# Altium PCB PCB1.PcbDoc
Units mil, origin at the board's own origin, x right, y up, seen from the top; angles counter-clockwise.
Board outline 1820 x 925 mil, 4 copper layers (Top Layer, GND1, GND2, Bottom Layer), stack 23.756 mil thick; 19 components, 11 nets, 102 pads, 29 vias.
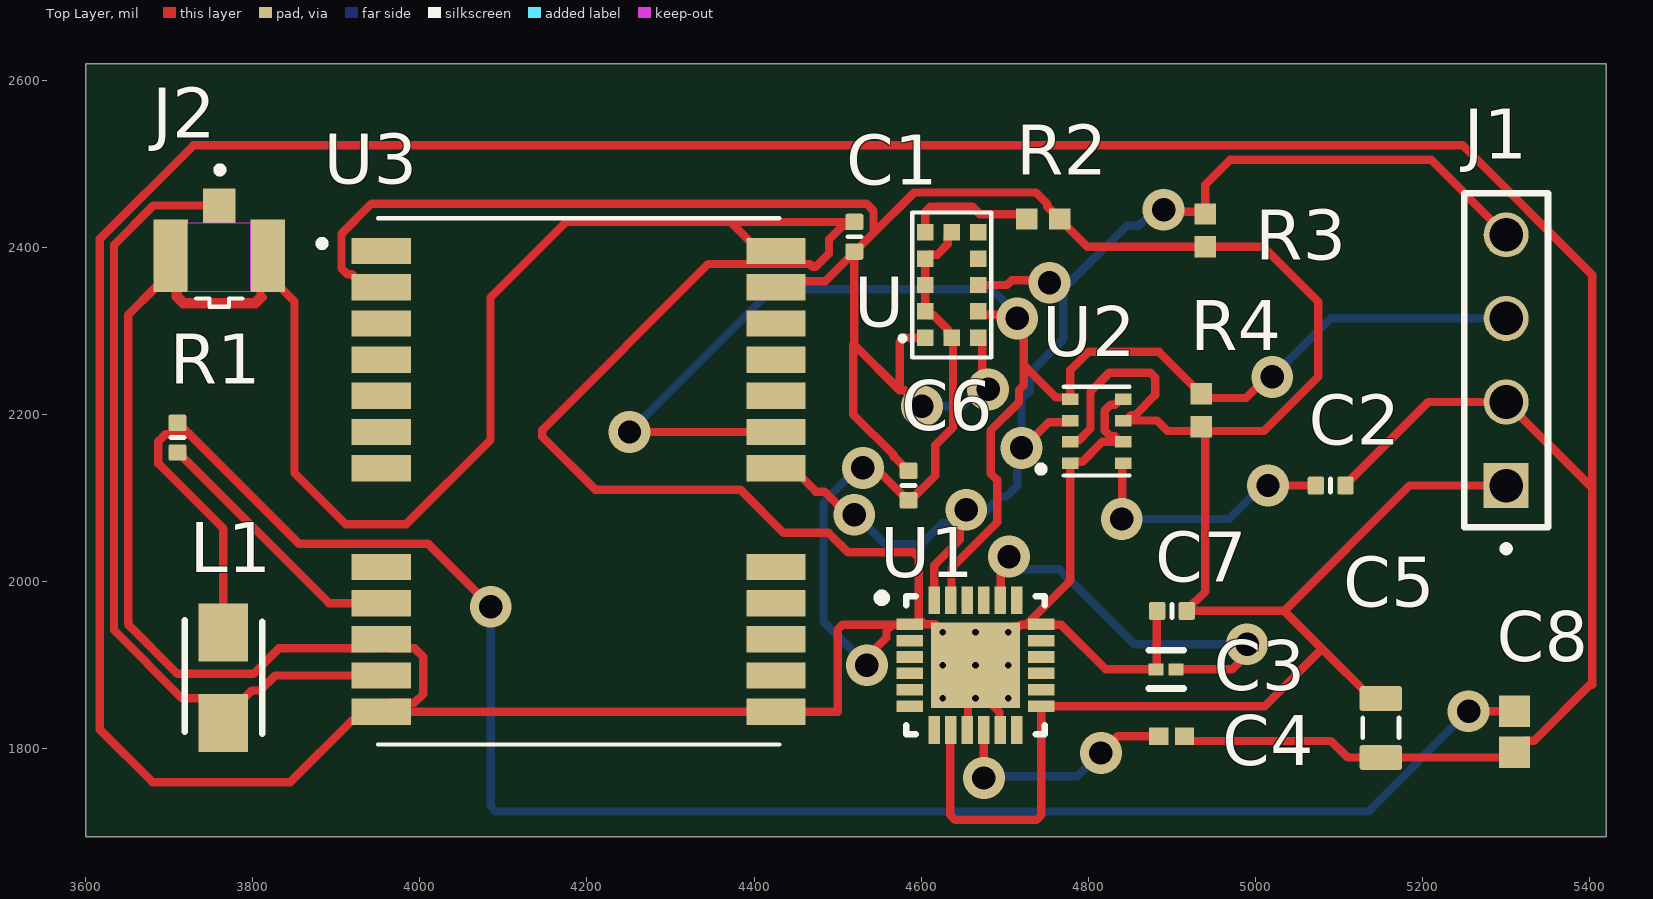
[diagram p0: Top Layer view]
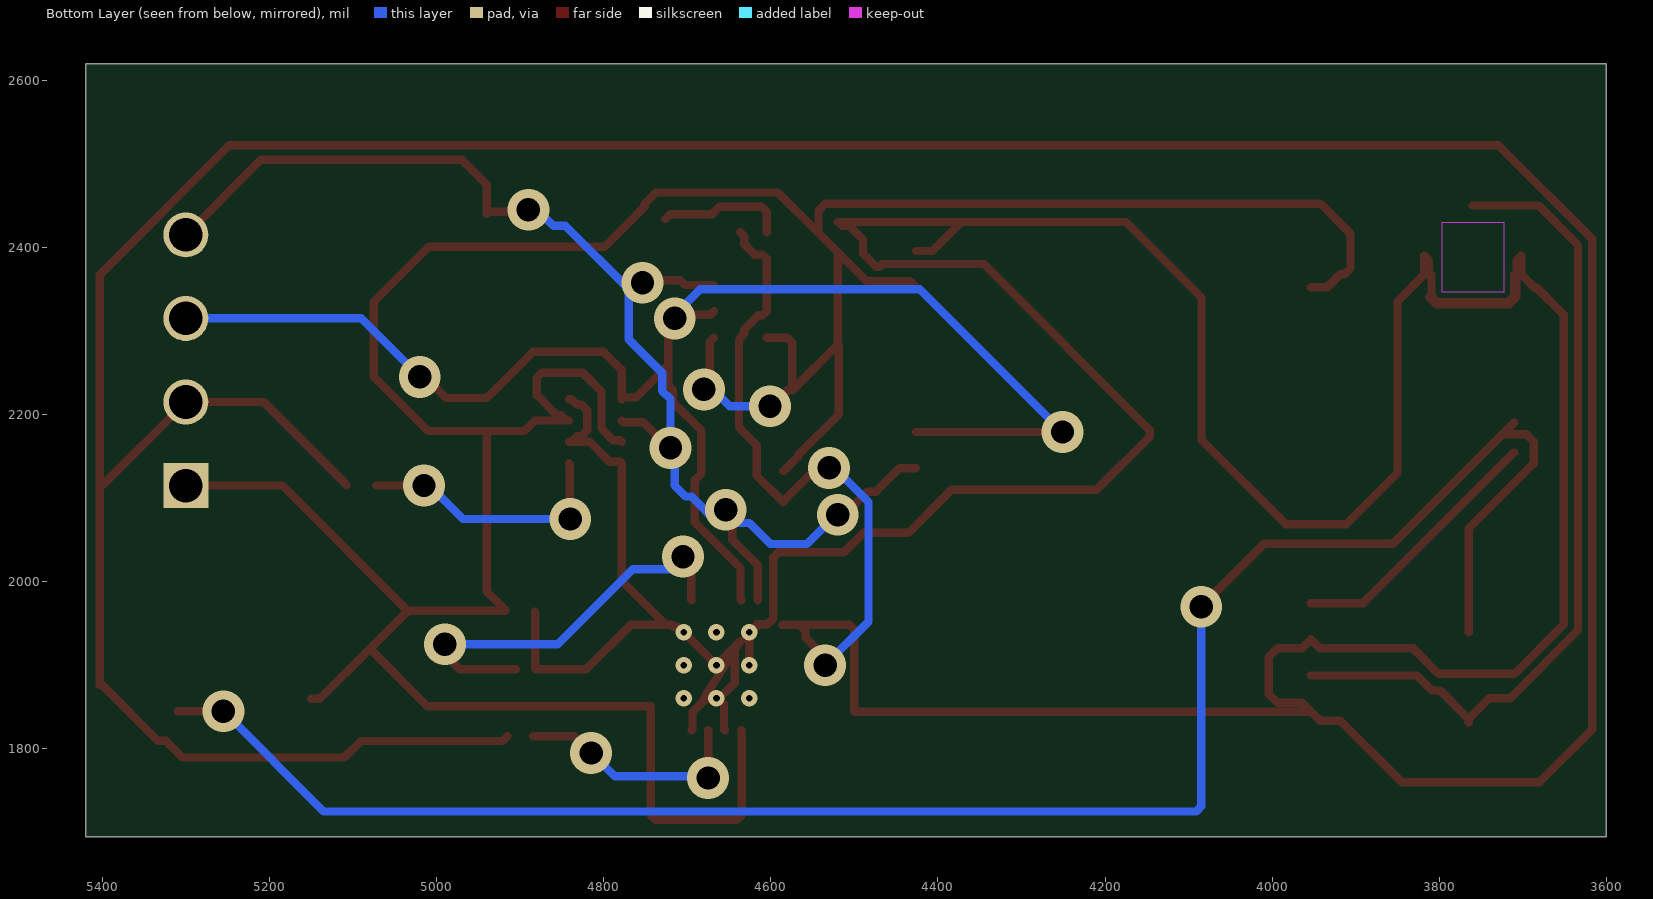
[diagram p1: Bottom Layer view, seen from below]
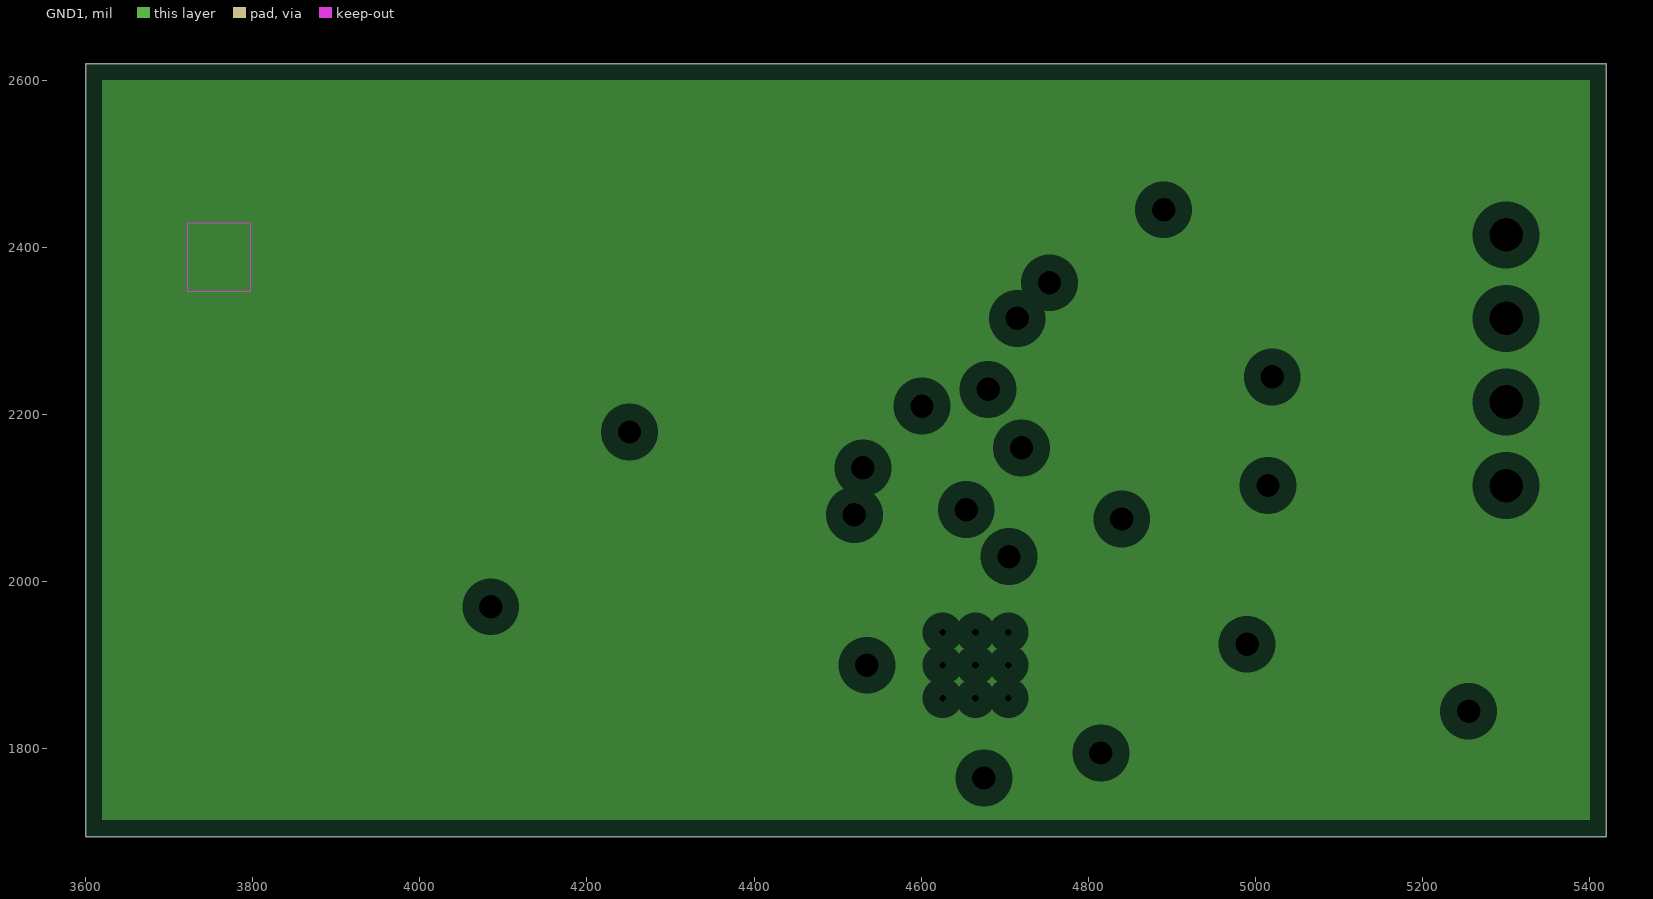
[diagram p2: GND1, clearances drawn from the general rule]
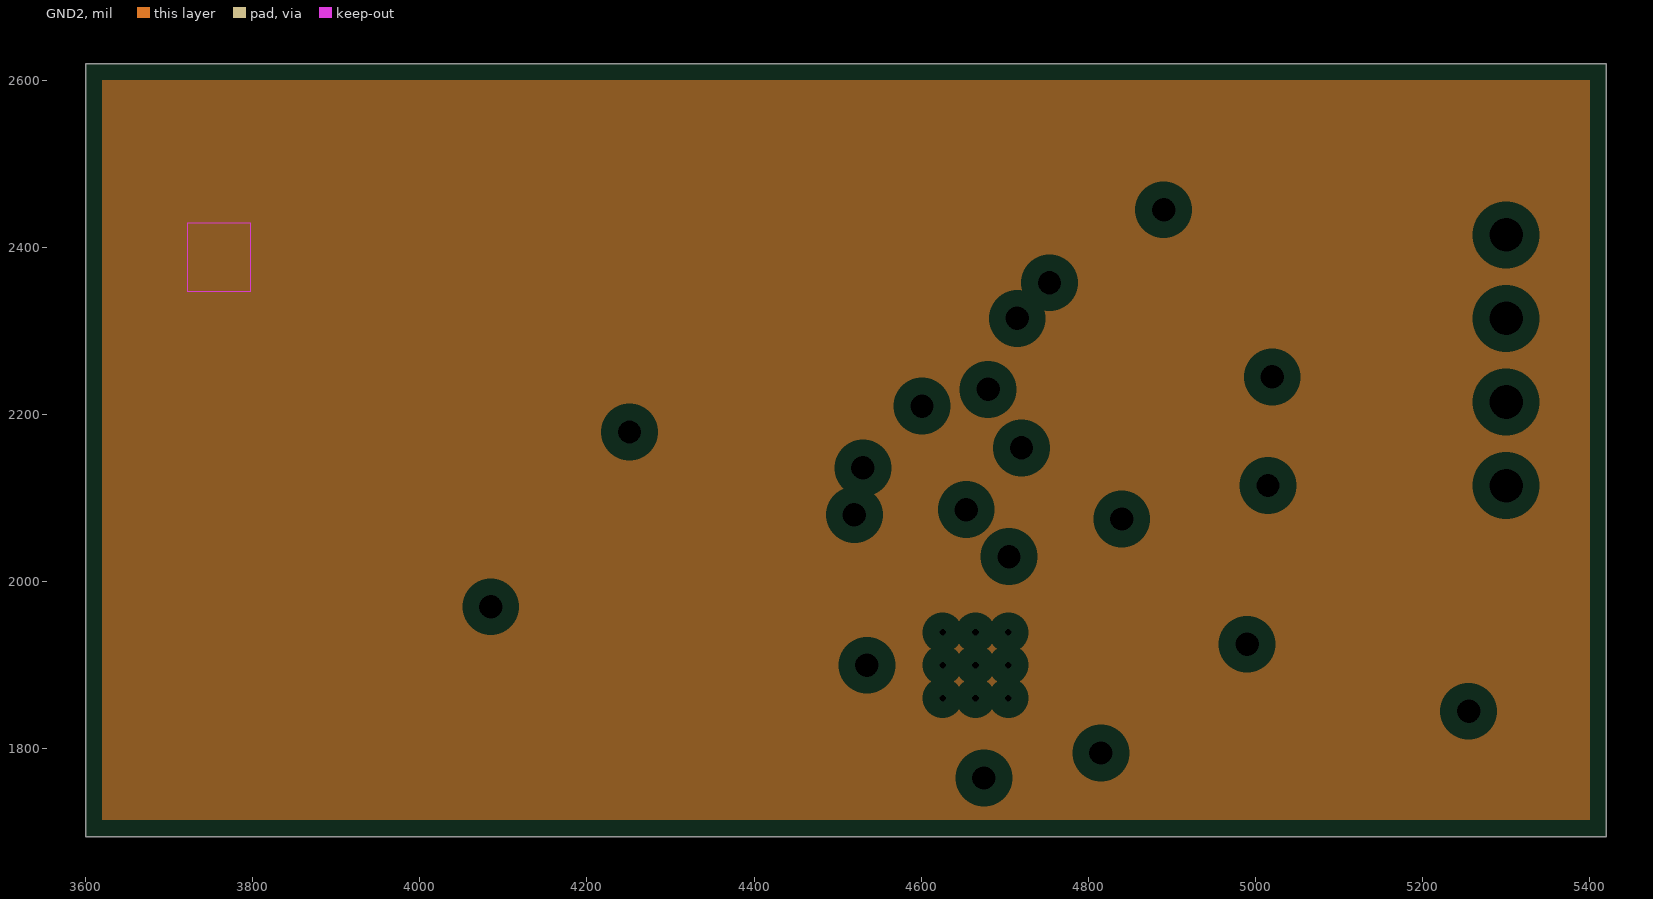
[diagram p3: GND2, clearances drawn from the general rule]
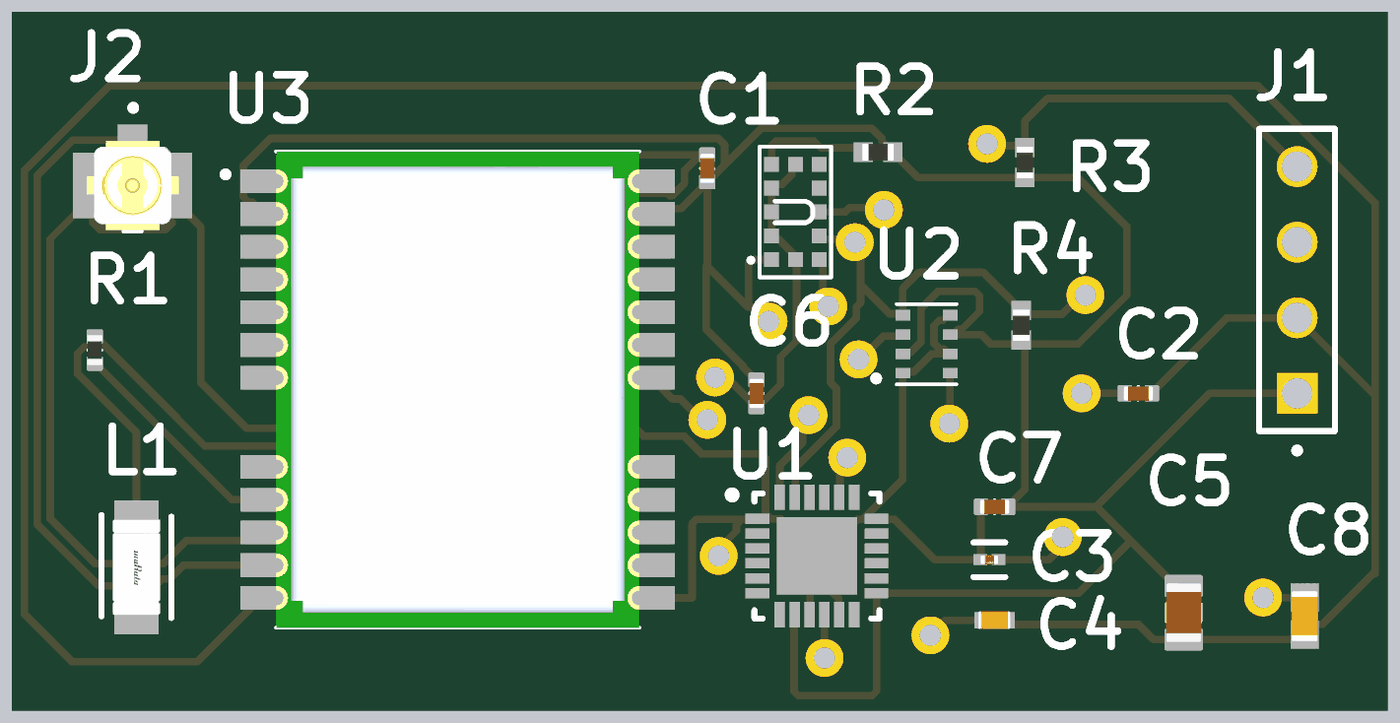
[diagram p4: 3D render of the assembled board from above, using the file's embedded part models]

## Layer stack, top to bottom
Top Solder: solder mask 0.4, Solder Resist, Dk 3.5
Top Layer: signal copper 1.4
Dielectric 2: prepreg 2.8, PP-006, Dk 4.1
GND1: plane copper 1.378
Dielectric 1: dielectric 12.6, FR-4, Dk 4.8
GND2: plane copper 1.378
Dielectric 3: prepreg 2.8, PP-006, Dk 4.1
Bottom Layer: signal copper 1.4
Bottom Solder: solder mask 0.4, Solder Resist, Dk 3.5

## Board outline
3600,1695 3600,2620 5420,2620 5420,1695

## Design rules (kind name [scope] priority, off if disabled: settings)
Clearance [All] p1: gap=7 ignorepadtopadclearanceinfootprint=TRUE
MinimumSolderMaskSliver [All] p1: minsoldermaskwidth=5.9
PlaneClearance [All] p1: clearance=20
PlaneConnect [All] p1: planeconnectstyle=Relief reliefexpansion=20 reliefentries=4 reliefconductorwidth=10 reliefairgap=10
PolygonConnect [All] p1: connectstyle=Relief reliefconductorwidth=10 reliefentries=4 polygonreliefangle="90 Angle" airgapwidth=10
RoutingVias [All] p1: holewidth=28 width=50 viastyle="Through Hole" minholewidth=28 minwidth=50 maxholewidth=28 maxwidth=50
SilkToSolderMaskClearance [IsPad] p1: minsilkscreentomaskgap=3.4 clearancetoexposedcopper=TRUE
SolderMaskExpansion [All] p1: expansion=0 istentingtop=FALSE
Width [All] p1: maxlimit=10 minlimit=10 preferedwidth=10
26 further rules are at their usual default settings.

## Components (designator, comment, footprint, x,y, rotation, side; value= is the part's Value field where it differs from the comment)
C1 "Capacitor 100nF +/-20% 10V 0402" CAPC0402(1005)60_L 4520,2412.72 r270 top value=100nF
C2 "Capacitor 100nF +/-20% 10V 0402" CAPC0402(1005)60_L 5090,2115 r0 top value=100nF
C3 "GRM033R70J222JA01J" FP-GRM033-0_03-IPC_B 4893.02,1895 r0 top
C4 "Capacitor 0.1 uF +/- 5% 16 V 0402" CAPC1005X56X25LL10T15 4899.65,1815 r0 top value=100nF
C5 "Capacitor 100µF +/-20% 6.3V 0805" CAPC0805(2012)145_L 5150,1825 r90 top value=100µF
C6 "Capacitor 100nF +/-20% 10V 0402" CAPC0402(1005)60_L 4585,2115 r90 top value=100nF
C7 "Capacitor 100nF +/-20% 10V 0402" CAPC0402(1005)60_L 4900,1965 r0 top value=100nF
C8 "Capacitor 100 nF +/-10% 50 V 0603" CAPC1608X90X40NL10T20 5310,1820.39 r90 top value=100nF
J1 "TSW-104-26-G-S" SAMTEC_TSW-104-26-G-S 5300,2115 r90 top
J2 "20279-001E-03" IPEX_20279-001E-03 3760,2390 r180 top
L1 "LQW31HN27NJ03L" FP-LQW31HN_03-MFG 3765,1885 r270 top
R1 "Resistor 10R  +/-1 % 0402 63 mW" RESC0402(1005)_L 3710,2172.28 r90 top value=10
R2 "Resistor 10k +/-1% 0402 100 mW" RESC1005X40X25ML05T05 4745.91,2434.02 r0 top value=10k
R3 "Resistor 4k7 +/-1% 0402 100 mW" RESC1005X40X25ML05T05 4940,2420.31 r90 top value=4.7k
R4 "Resistor 4k7 +/-1% 0402 100 mW" RESC1005X40X25ML05T05 4935,2205 r90 top value=4.7k
U "VL53L0X" SENSOR_VL53L0X 4636.5,2355 r90 top
U1 "MPU6050" INSE-QFN-24_V 4665,1900 r0 top
U2 "BMP280" XDCR_BMP280 4810,2180 r180 top
U3 "NEO-M9N-00B" XCVR_NEO-M9N-00B 4190,2120 r0 top

## Footprints (in the part's own frame and the unit in brackets; to place one, negate y for a bottom-side part, rotate by r counter-clockwise, add the part's x,y. Pads: shape width x height; smd on the part's side, far side on the other; paste and mask are expansions set on the pad)
CAPC0402(1005)60_L [mm] "Chip Capacitor, Body 1.0x0.5mm, Height 0.6mm, IPC High Density"
  rrect25% 0.5x0.55 smd: 1(-0.45,0) 2(0.45,0)
  silkscreen extent 0,-0.2 0,0.2, body extent -0.5,-0.25 0.5,0.25, height 0.6
CAPC0805(2012)145_L [mm] "Chip Capacitor, Body 2.0x1.2mm, Height 1.45mm, IPC High Density"
  rrect25% 0.76x1.3 smd: 1(-0.9,0) 2(0.89,0)
  silkscreen extent -0.3,-0.55 0.3,0.55, body extent -1,-0.6 1,0.6, height 1.45
CAPC1005X56X25LL10T15 [mm] "Chip Capacitor, 2-Leads, Body 1.10x0.60mm, IPC High Density"
  rect 0.58x0.54 smd: 1(-0.39,0) 2(0.39,0)
  body extent -0.55,-0.3 0.55,0.3, height 0.56
CAPC1608X90X40NL10T20 [mm] "Chip Capacitor, 2-Leads, Body 1.70x0.90mm, IPC Medium Density"
  rect 0.95x0.95 smd: 1(-0.625,0) 2(0.625,0)
  body extent -0.85,-0.45 0.85,0.45, height 0.9
FP-GRM033-0_03-IPC_B [mil]
  rect 17.88x14.28 smd paste+0 mask+0: 1(-11.98,0) 2(11.98,0)
  silkscreen extent -21,-23 21,23, body extent -27,-13 27,13, height 10
FP-LQW31HN_03-MFG [mm]
  rect 1.75x1.5 smd paste+0 mask+0: 1(-1.375,0) 2(1.375,0)
  silkscreen extent -1.75,-1.17 1.7,1.17, body extent -2.35,-1 2.35,1, height 0.25
INSE-QFN-24_V [mm] "QFN, 24-Leads, Body 4.00x4.00mm, Pitch 0.50mm, Thermal Pad 2.7x2.6mm"
  rect 0.8x0.35 smd: 1(-2,1.25) 2(-2,0.75) 3(-2,0.25) 4(-2,-0.25) 5(-2,-0.75) 6(-2,-1.25) 13(2,-1.25) 14(2,-0.75) 15(2,-0.25) 16(2,0.25) 17(2,0.75) 18(2,1.25)
  rect 0.35x0.85 smd: 7(-1.25,-1.975) 8(-0.75,-1.975) 9(-0.25,-1.975) 10(0.25,-1.975) 11(0.75,-1.975) 12(1.25,-1.975) 19(1.25,1.975) 20(0.75,1.975) 21(0.25,1.975) 22(-0.25,1.975) 23(-0.75,1.975) 24(-1.25,1.975)
  rect 2.7x2.6 smd: 25(0,0)
  silkscreen extent -2.97,-2.1 2.1,2.17, body extent -2,-2 2,2, height 0.95
IPEX_20279-001E-03 [mm]
  rect 1x1.05 smd: 1(0,-1.525)
  rect 1.05x2.2 smd: 2(1.475,0) 3(-1.475,0)
  Keep-Out Layer region: 0.95,-1 -0.95,-1 -0.95,1.1 0.95,1.1
  silkscreen extent -0.7,-2.71 0.7,1.55, body extent -1.5,-1.55 1.5,1.55, height 1.25
RESC0402(1005)_L [mm] "Chip Resistor, Body 1.0x0.5mm, IPC High Density"
  rrect25% 0.5x0.55 smd: 1(-0.45,0) 2(0.45,0)
  silkscreen extent 0,-0.2 0,0.2, body extent -0.5,-0.25 0.5,0.25, height 0.3
RESC1005X40X25ML05T05 [mm] "Chip Resistor, 2-Leads, Body 1.05x0.55mm, IPC Low Density"
  rect 0.65x0.65 smd: 1(-0.5,0) 2(0.5,0)
  body extent -0.53,-0.28 0.53,0.28, height 0.4
SAMTEC_TSW-104-26-G-S [mm]
  round 1.37 hole 1.02: GND(2.54,0) SCL(5.08,0) SDA(7.62,0)
  rect 1.37x1.37 hole 1.02: VCC(0,0)
  silkscreen extent -2.02,-1.27 8.89,1.27
SENSOR_VL53L0X [mm]
  rect 0.5x0.5 smd: 1(-1.6,0.8) 2(-0.8,0.8) 3(0,0.8) 4(0.8,0.8) 5(1.6,0.8) 6(1.6,0) 7(1.6,-0.8) 8(0.8,-0.8) 9(0,-0.8) 10(-0.8,-0.8) 11(-1.6,-0.8) 12(-1.6,0)
  silkscreen extent -2.2,-1.2 2.2,1.57
XCVR_NEO-M9N-00B [mm]
  rect 1.8x0.8 smd paste-2: 1(-6,7) 2(-6,5.9) 3(-6,4.8) 4(-6,3.7) 5(-6,2.6) 6(-6,1.5) 7(-6,0.4) 8(-6,-2.6) 9(-6,-3.7) 10(-6,-4.8) 11(-6,-5.9) 12(-6,-7) 13(6,-7) 14(6,-5.9) 15(6,-4.8) 16(6,-3.7) 17(6,-2.6) 18(6,0.4) 19(6,1.5) 20(6,2.6) 21(6,3.7) 22(6,4.8) 23(6,5.9) 24(6,7)
  silkscreen extent -7.9,-8 6.1,8, body extent -6.1,-8 6.1,8, height 2.6
XDCR_BMP280 [mm]
  rect 0.5x0.35 smd: 1(0.8,0.975) 2(0.8,0.325) 3(0.8,-0.325) 4(0.8,-0.975) 5(-0.8,-0.975) 6(-0.8,-0.325) 7(-0.8,0.325) 8(-0.8,0.975)
  silkscreen extent -1,-1.35 1.79,1.35

## Part data
C1 C2 C6 C7: library part CMP-001-00061-3, "Chip Capacitor, 100nF +/-20%, 10V, 0402, Thickness 0.6 mm", Case/Package=0402, Max Operating Temperature=85°C, Min Operating Temperature=-55°C, Tolerance=20%, Voltage Rating=10V, Mounting Technology=SMT, Pins=2
C3: library part CMP-06035-025705-1, "Chip Multilayer Ceramic Capacitors for General Purpose, 0201, 2200pF, X7R, 15%, 5%, 6.3V", Capacitance=2.2nF, Dielectric=X7R, Tolerance=5%, Voltage Rating (DC)=6.3V, Length=600um, Thickness=300um, Width=300um
C4: library part CMP-001-00001-6, "Chip Capacitor, 0.1 uF, +/- 5%, 16 V, 0402 (1005 Metric)", Capacitor Type=Ceramic, Case/Package=0402, Max Operating Temperature=125°C, Min Operating Temperature=-55°C, Tolerance=5%, Voltage Rating=16V, Mounting Technology=SM, Pins=2, RoHS Compliant=True
C5: library part CMP-001-00054-4, "Chip Capacitor, 100µF +/-20%, 6.3V, 0805, Thickness 1.45 mm", Case/Package=0805, Max Operating Temperature=85°C, Min Operating Temperature=-55°C, Tolerance=10%, Voltage Rating=6.3V, Mounting Technology=SMT, Pins=2
C8: library part CMP-001-00017-6, "Chip Capacitor, 100 nF, +/- 10%, 50 V, 0603 (1608 Metric)", Capacitor Type=Ceramic, Case/Package=0603, Max Operating Temperature=125°C, Min Operating Temperature=-55°C, Tolerance=10%, Voltage Rating=50V, Mounting Technology=SM, Pins=2, RoHS Compliant=True
J1: library part CMP-009-000000-2, Package=None, Availability=Unavailable, Component Type=Standard, Design Item ID=TSW-104-26-G-S, MP=TSW-104-26-G-S, Pin Count=4, Price=None, Source=TSW-104-26-G-S.SchLib
J2: library part CMP-002-00071-1, "1 POS Vertical SMD Small form factor with big performance through 6 GHz connector,MHF, RF, micro-coaxial MHF I Receptacle", Case/Package=None, Check_prices=https://www.snapeda.com/parts/20279-001E-03/I-PEX/view-part/?ref=eda, Component Type=Standard, Design Item ID=20279-001E-03, MF=I-PEX, MP=20279-001E-03, Pins=3, SnapEDA_Link=https://www.snapeda.com/parts/20279-001E-03/I-PEX/view-part/?ref=snap, Source=20279-001E-03.SchLib
L1: library part CMP-06042-006372-1, "Wire Wound RF Inductor 27nH ±5% 0.0714Ω 560mA 1206", Case Code (Imperial)=1206, Case Code (Metric)=3216, Current Rating=560mA, DC Resistance (DCR)=51mR, Inductance=27nH, Max Operating Temperature=85°C, Min Operating Temperature=-40°C, Package Quantity=2000, Resistor Type=Wirewound, Self Resonant Frequency=1GHz, Test Frequency=100MHz, Tolerance=5%, Case/Package=1206, Core Material=Ferrite, DC Current=560mA, Depth=1.8mm, Height=1.8mm, Height - Seated (Max)=0.079inch, Length=3.2mm, Max DC Current=560mA, Military Standard=Not, Mount="Surface Mount", Packaging="Tape and Reel", Q Factor=60, Radiation Hardening=No, Shielding=Unshielded, Termination=SMD/SMT, Weight=0.000705oz, Width=0.063inch
R1: library part CMP-009-00152-3, "Chip Resistor, 10 Ohms, +/-1 %, 63 mW, -55 to 155 degC, 0402", Case/Package=0402, Max Operating Temperature=155°C, Min Operating Temperature=-55°C, Power=63mW, Tolerance=1%, Pins=2
R2: library part CMP-009-00015-5, "Chip Resistor, 10 KOhm, +/- 1%, 0.1 W, -55 to 155 degC, 0402 (1005 Metric)", Case/Package=0402, Max Operating Temperature=155°C, Min Operating Temperature=-55°C, Power=100mW, Tolerance=1%, Voltage Rating=50V, Mounting Technology=SM, Pins=2, RoHS Compliant=True
R3 R4: library part CMP-009-00030-5, "Chip Resistor, 4.7 KOhm, +/- 1%, 0.1 W, -55 to 155 degC, 0402 (1005 Metric)", Case/Package=0402, Max Operating Temperature=155°C, Min Operating Temperature=-55°C, Power=100mW, Tolerance=1%, Voltage Rating=50V, Mounting Technology=SM, Pins=2, RoHS Compliant=True
U: library part CMP-013-000000-1, "VL53L0X - Light, 3D Time-of-Flight _ToF_ Sensor Evaluation Board", Package=None, Availability=Unavailable, Component Type=Standard, Design Item ID=VL53L0X, MF=STMicroelectronics, MP=VL53L0X, Pin Count=11, Price=None, SnapEDA_Link=https://www.snapeda.com/parts/VL53L0X/STMicroelectronics/view-part/473967/?ref=snap, Source=SnapEDAsch.SchLib
U1: library part CMP-010-00014-3, "3-Axis Gyroscope, 3-Axis Accelerometer, 2.375 to 3.46 V, -40 to 105 degC, 24-Pin QFN, RoHS, Tape and Reel", Case/Package=QFN, Manufacturer=InvenSense, Max Operating Temperature=85°C, Max Supply Voltage=3.6V, Min Operating Temperature=-40°C, Min Supply Voltage=2.5V, Package Description="24-Pin Quad Flat No-lead Package, Body 4 x 4 mm, Pitch 0.5 mm", Package Quantity=5000, Package Reference=QFN-24, Datasheet URL=https://datasheet.ciiva.com/1513/1788002-1513632.pdf, Datasheet Version="Rev. 3.4, 08/2013", Interface=I2C, Mounting Technology=SM, Packaging=CutTape, Pins=24, RoHS Compliant=True, Sensor Type=Motion
U2: library part CMP-00029-00001-1, "BMP280 Absolute Barometric Pressure Sensor for Battery Powered Devices 2 x 2.5mm", Case/Package=None, Availability=Unavailable, Component Type=Standard, Design Item ID=BMP280, MP=BMP280, Pins=8, Price=None, Source=BMP280.SchLib
U3: library part CMP-015-000000-1, "series RF Receiver BeiDou, Galileo, GLONASS, GNSS, GPS - -167dBm - - Module", Package="SMD-24 u-blox", Check_prices=https://www.snapeda.com/parts/NEO-M9N-00B/u-blox/view-part/?ref=eda, Component Type=Standard, Design Item ID=NEO-M9N-00B, MF=u-blox, MP=NEO-M9N-00B, Pin Count=24, SnapEDA_Link=https://www.snapeda.com/parts/NEO-M9N-00B/u-blox/view-part/?ref=snap, Source=NEO-M9N-00B.SchLib

## Via types
v1: diameter 50, hole 28, Top Layer to Bottom Layer, 20 vias
v2: diameter 19.68, hole 7.87, Top Layer to Bottom Layer, 9 vias

## Nets (pads, with @x,y where several pads share a name; then routed paths per layer and width w, separated by ;. In a path a pad name is that pad's centre, name@x,y a point inside that pad or via, vN(x,y) a via of type N, cw(c..) or ccw(c..) an arc to the next point about the centre after c; other vN are vias at no path point)
GND: C1.1 C2.2 C3.1 C4.2 C5.1 C6.1 C7.1 C8.1 J1.GND J2.2 J2.3 U1.1 U1.9 U1.11 U1.18 U1.25 U2.1 U2.5 U2.7 U3.10 U3.12 U3.13 U3.24 U.2 U.3 U.4 U.6 U.12 | length 10532.5
  Top Layer w10: J2.2@3710.6,2367.36 3710.6,2341.72 3717.63,2334.69 3802.37,2334.69 3809.4,2341.72 3809.4,2367.36 J2.3@3812.4,2367.36 ; 3812.4,2340.48 3803.61,2331.69 3716.39,2331.69 3707.6,2340.48 3707.6,2384.33 J2.2 3701.93,2367.36 3686.26,2351.69 3683.44,2351.69 3651,2319.25 3651,1949 3710.31,1889.69 3800.74,1889.69 3831.33,1920.28 3943.03,1920.28 U3.10 3964.53,1920.28 3993.61,1920.28 4004.21,1909.68 4004.21,1865.76 3993.61,1855.16 3964.53,1855.16 U3.12 ; U3.24 4406.54,2395.59 4371.69,2430.43 ; C1.1 C1.1@4519.02,2430.43 ; v1(4530.2,2136.08) 4537.85,2128.43 4552.87,2128.43 4584.02,2097.28 C6.1 ; v1(4535,1900) 4535,1909.55 4558.51,1933.06 4558.51,1941.39 4565.54,1948.42 ; C6.1@4585,2095 4616.84,2126.84 4616.84,2163.34 4638,2184.5 4638,2289.12 U.12@4635.8,2291.31 ; U1.1@4586.26,1948.42 4565.54,1948.42 ; U1.25@4616.85,1946.18 4625.63,1937.4 v2(4625.63,1900) ; U1.25@4616.85,1949.02 4603.93,1949.02 4596.9,1956.05 4596.9,2029.14 4591.04,2035 4512.67,2035 4489.23,2058.44 4435.38,2058.44 4383.82,2110 4210,2110 4146.64,2173.36 4146.64,2181.64 4345.03,2380.03 4466.62,2380.03 4470.14,2376.52 4473.65,2376.52 4489.64,2392.5 4489.64,2409.61 4505.62,2425.59 4514.17,2425.59 C1.1@4519.02,2430.43 ; U.12 4631.65,2296.85 4631.65,2302.01 4615,2318.66 4609.84,2318.66 U.2 U.3 U.4 4609.84,2391.34 4619.24,2391.34 4631.65,2403.75 4631.65,2413.15 U.6 ; U1.25@4643.16,1912.24 4643.16,1878.71 U1.25@4655.16,1866.71 ; U1.9 4655.95,1823.04 4655.95,1853.82 4662.76,1860.63 v2(4665,1860.63) 4679.86,1860.63 4675.53,1867.38 4657.64,1895.28 4645.72,1913.88 4636.07,1928.93 v2(4665,1900) 4711.18,1946.18 4716.77,1946.18 4719.01,1948.42 4743.74,1948.42 4767.46,1948.42 4820.88,1895 C3.1 4881.66,1895.62 4881.66,1963.39 C7.1@4882.28,1964.02 ; U1.25@4678.46,1859.22 4693.73,1843.95 4693.73,1823.04 U1.11 ; 4726.07,1949.02 4730.57,1953.52 4778.5,2001.46 U2.1 4780.39,2143.5 4792.75,2143.5 4816.45,2167.2 U2.7 ; U2.7@4836.65,2169.09 4831.84,2173.91 4826.68,2173.91 4819.65,2180.93 4819.65,2204.66 4826.68,2211.69 4831.84,2211.69 4838.54,2218.39 U2.5 ; C4.2 4920.63,1809.37 5090.59,1809.37 5110.39,1789.57 C5.1 5303.78,1789.57 C8.1 5323.7,1809.49 5333.1,1809.49 5400,1876.39 ; C2.2 5107.72,2115.98 5206.73,2215 J1.GND 5400,2115 ; 5403,1876.39 5403,2367.11 5248.11,2522 3728.94,2522 3617,2410.06 3617,1823 3680,1760 3845,1760 3918.66,1833.66 3943.03,1833.66 U3.12 ; J2.3@3812.4,2367.36 J2.3@3818.07,2367.36 ; J2.3@3812.4,2367.36 3812.4,2384.33 J2.3 J2.3@3818.07,2367.36 ; J2.3@3818.07,2367.36 3850,2335.43 3850,2130 3911.21,2068.79 3983.79,2068.79 4084.6,2169.6 4084.6,2340.01 4175.02,2430.43 4371.69,2430.43 ; U3.12 U3.13 4500,1844.41 4500,1942.56 4505.86,1948.42 4565.54,1948.42 ; 4371.69,2430.43 C1.1@4519.02,2430.43
  Bottom Layer w10: v1(4530.2,2136.08) 4523.75,2136.08 4483,2095.33 4483,1952 v1(4535,1900)
  other v2: 4625.63,1860.63 4704.37,1860.63 4704.37,1900 4625.63,1939.37 4665,1939.37 4704.37,1939.37
NetC3_2: C3.2 U1.20 | length 489.4
  Top Layer w10: U1.20 4695.31,1978.54 4695.31,2009.49 4705,2019.18 v1(4705,2030) ; C3.2 4971.72,1895 4982.35,1905.63 4982.35,1917.35 v1(4990,1925)
  Bottom Layer w10: v1(4705,2030) 4720,2015 4765,2015 4855,1925 v1(4990,1925)
NetC4_1: C4.1 U1.10 | length 282.3
  Top Layer w10: U1.10 4674.92,1822.17 4674.92,1765.08 v1(4675,1765) ; v1(4815,1795) 4835,1815 C4.1
  Bottom Layer w10: v1@4679.15,1767 4786.43,1767 4814.43,1795 v1(4815,1795)
NetC8_2: C8.2 L1.1 R1.2 | length 2418.7
  Top Layer w10: R1.2 3710.98,2190 3819.58,2081.41 ; L1.1 3765,2063.37 3687.17,2141.2 3687.17,2167.94 3695.64,2176.41 3724.36,2176.41 3855.38,2045.39 4009.61,2045.39 v1(4085,1970) ; v1(5255,1845) C8.2
  Bottom Layer w10: v1(4085,1970) 4085,1730.86 4090.86,1725 5135,1725 v1(5255,1845)
NetJ2_1: J2.1 L1.2 U3.11 | length 996.7
  Top Layer w10: J2.1 3681.02,2450.04 3634,2403.02 3634,1941.96 3715.64,1860.31 3740.47,1860.31 L1.2@3765,1835.79 ; L1.2 L1.2@3765,1835.79 ; U3.11 3827.06,1887.72 3809.03,1869.69 3798.9,1869.69 L1.2@3765,1835.79
NetR1_1: R1.1 U3.9 | length 318.4
  Top Layer w10: R1.1 3710.98,2154.57 3891.22,1974.33 U3.9
NetR2_1: R2.1 U.5 | length 154.6
  Top Layer w10: U.5 4605,2442.83 4610.86,2448.69 4661.2,2448.69 4670.06,2439.83 4720.4,2439.83 R2.1
SCL: J1.SCL R4.2 U1.23 U2.4 U3.19 U.10 | length 1856.7
  Top Layer w10: v1(4250.94,2179.06) U3.19 ; U1.23 4636.27,1978.55 4636.27,2016.27 4690.84,2070.84 4690.84,2121.84 4683,2129.67 4683,2180.67 4717,2214.67 4717,2229.33 4722.65,2234.98 4722.65,2259.83 ; U.10 4672.24,2319.25 4710.75,2319.25 4722.65,2307.35 4722.65,2260.83 ; 4725.1,2256.57 4729.7,2251.98 4761.4,2220.28 4776.61,2220.28 U2.4 4778.5,2253.5 4800,2275 4884.69,2275 4927.2,2232.48 4940,2219.69 4988.75,2219.69 5014.06,2245 v1(5020,2245)
  Bottom Layer w10: v1(4250.94,2179.06) 4421.89,2350 4684.06,2350 4715,2319.06 v1(4715,2315) ; v1(5020,2245) 5090,2315 J1.SCL
SDA: J1.SDA R3.2 U1.24 U2.3 U3.18 U.9 | length 1595.4
  Top Layer w10: U3.18 4445.91,2135.75 4474,2107.65 4484.01,2107.65 4511.67,2080 v1(4520,2080) ; U1.24 4615.79,2019.83 4646.18,2050.22 4646.18,2078.51 v1(4653.84,2086.16) ; U.9 4702.67,2355 4708.48,2360.8 4750.33,2360.8 v1(4753.48,2357.65) ; v1(4720,2160) 4721.83,2160 4752.73,2190.91 4776.61,2190.91 U2.3 ; v1(4890,2445) 4892.5,2442.5 4937.5,2442.5 R3.2 4940,2475 4970,2505 5210,2505 J1.SDA
  Bottom Layer w10: v1(4520,2080) 4521.88,2080 4556.88,2045 4600.53,2045 4625.63,2070.1 4661.45,2070.1 v1@4662.24,2069.31 ; v1(4653.84,2086.16) 4662.24,2077.76 v1@4662.24,2069.31 ; v1(4753.48,2357.65) 4762.35,2357.65 v1@4770,2350 ; v1(4890,2445) 4879.18,2445 4859.86,2425.68 4845.68,2425.68 v1@4770,2350 ; v1@4662.24,2069.31 4694.75,2101.82 4701.82,2101.82 4715,2115 4715,2155 v1(4720,2160) 4720,2218.39 4730,2228.39 4730,2250 4770,2290 v1@4770,2350
VCC: C1.2 C5.2 C6.2 C7.2 J1.VCC R2.2 R3.1 R4.1 U1.8 U1.13 U2.2 U2.6 U3.2 U3.23 U.1 U.11 | length 4308.2
  Top Layer w10: U3.2 3934.09,2352.28 3918.54,2367.84 3913.38,2367.84 3906.35,2374.87 3906.35,2416.31 3942.31,2452.28 4534.36,2452.28 4542.83,2443.8 4542.83,2417.06 C1.2@4520,2394.23 ; U3.23 4433.45,2359.52 4485.28,2359.52 C1.2@4520,2394.23 ; 4520,2284.71 C1.2@4520,2394.23 ; C1.2 C1.2@4520,2394.23 ; 4542.94,2416.95 4591.68,2465.69 4737.11,2465.69 4751.02,2451.78 4751.02,2448.59 R2.2 4798.98,2400.63 R3.1 5009.37,2400.63 5075,2335 5075,2245 5010.31,2180.32 R4.1@4940,2180.32 ; C6.2 4584.02,2132.72 4567.2,2149.54 4567.2,2151.41 4518.63,2199.97 4518.63,2283.35 4519.32,2284.03 4574.3,2229.05 ; v1(4601,2210) 4599.18,2210 4580.13,2229.05 4574.3,2229.05 ; U.1 4580.16,2292.01 4574.3,2286.15 4574.3,2229.05 ; U1.8 4634.68,1821.45 4634.68,1720.86 4640.54,1715 4737.88,1715 4743.74,1720.86 U1.13 5010.79,1850.79 5079.7,1919.7 ; U.11 4672.83,2287.17 4672.83,2237.18 v1(4680.01,2230.01) ; U2.2 4780.39,2169.09 4788.51,2169.09 4802.65,2183.24 4802.65,2227.65 4825,2250 4874.14,2250 4880,2244.14 4880,2223.19 4856.31,2199.5 4851.15,2199.5 4844.45,2192.8 U2.6 4882.09,2192.8 4894.57,2180.32 R4.1@4940,2180.32 ; C5.2 5139.37,1860.04 5079.7,1919.7 ; J1.VCC 5184.41,2115 5034.41,1965 ; R4.1@4940,2180.32 4940,1988.27 4917.72,1965.98 C7.2 5034.41,1965 ; 5034.41,1965 5079.7,1919.7
  Bottom Layer w10: v1(4601,2210) 4649.18,2210 4669.18,2230.01 v1(4680.01,2230.01)
VDD: C2.1 U2.8 | length 316.1
  Top Layer w10: v1(4840,2075) 4840.75,2075.75 4840.75,2140.87 U2.8 ; v1(5015,2115) C2.1
  Bottom Layer w10: v1(4840,2075) 4968.43,2075 5008.43,2115 v1(5015,2115)
pads on no net: U1.2 U1.3 U1.4 U1.5 U1.6 U1.7 U1.12 U1.14 U1.15 U1.16 U1.17 U1.19 U1.21 U1.22 U3.1 U3.3 U3.4 U3.5 U3.6 U3.7 U3.8 U3.14 U3.15 U3.16 U3.17 U3.20 U3.21 U3.22 U.7 U.8

## Polygon pours and split planes (outlines as drawn)
no net on GND1 (split plane): 5399.9,1715.1 3620.1,1715.1 3620.1,2599.9 5399.9,2599.9
no net on GND2 (split plane): 5399.9,1715.1 3620.1,1715.1 3620.1,2599.9 5399.9,2599.9